# EAGLE board sensor (EAGLE 9.4.2)
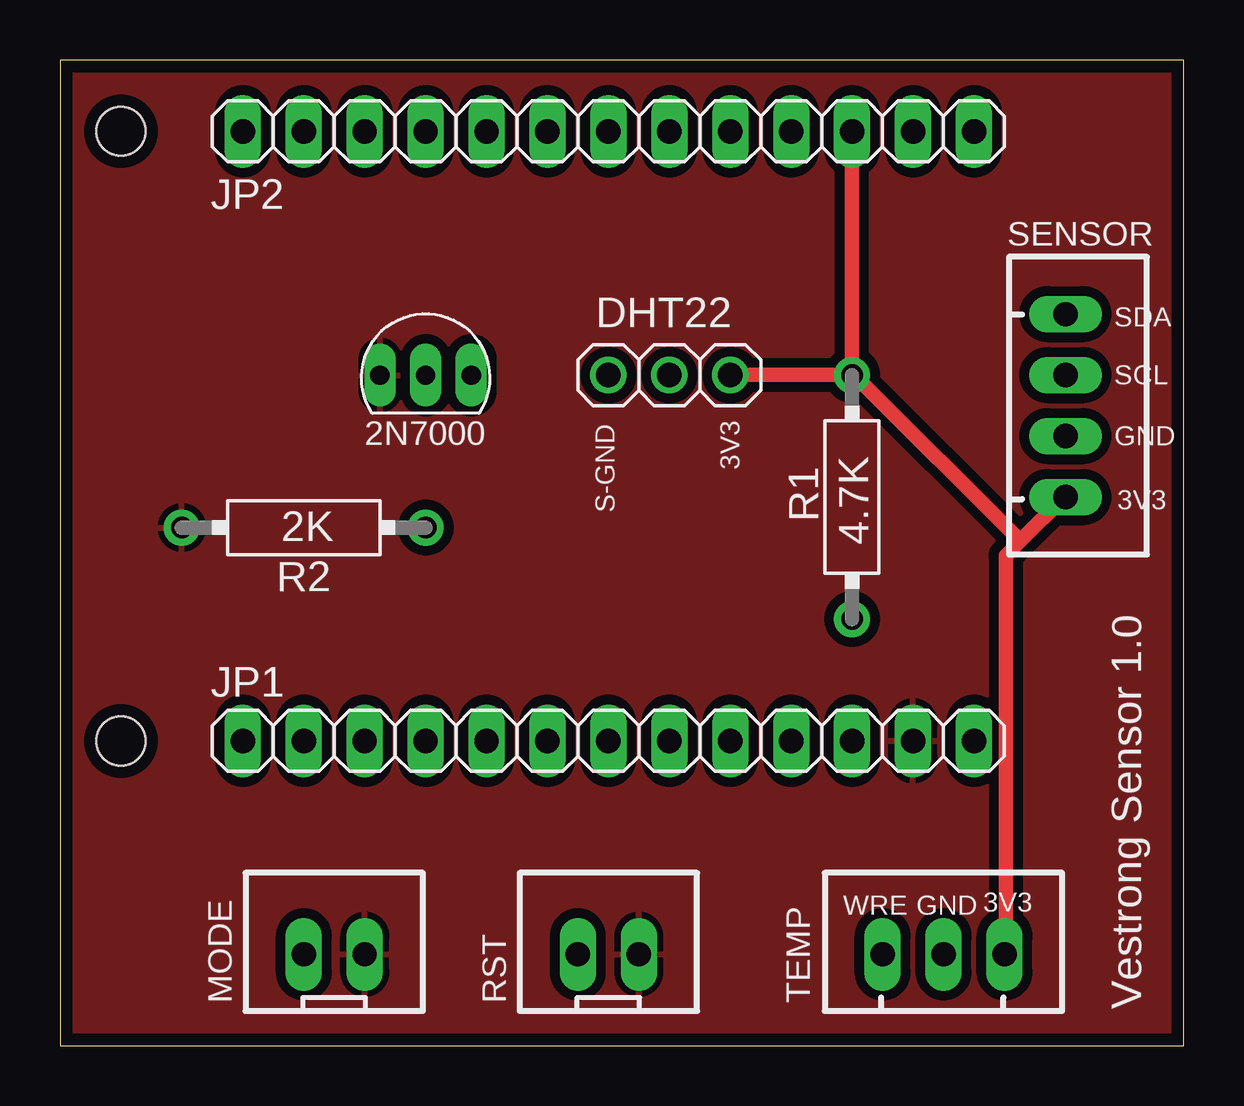
[diagram p0: board, top side]
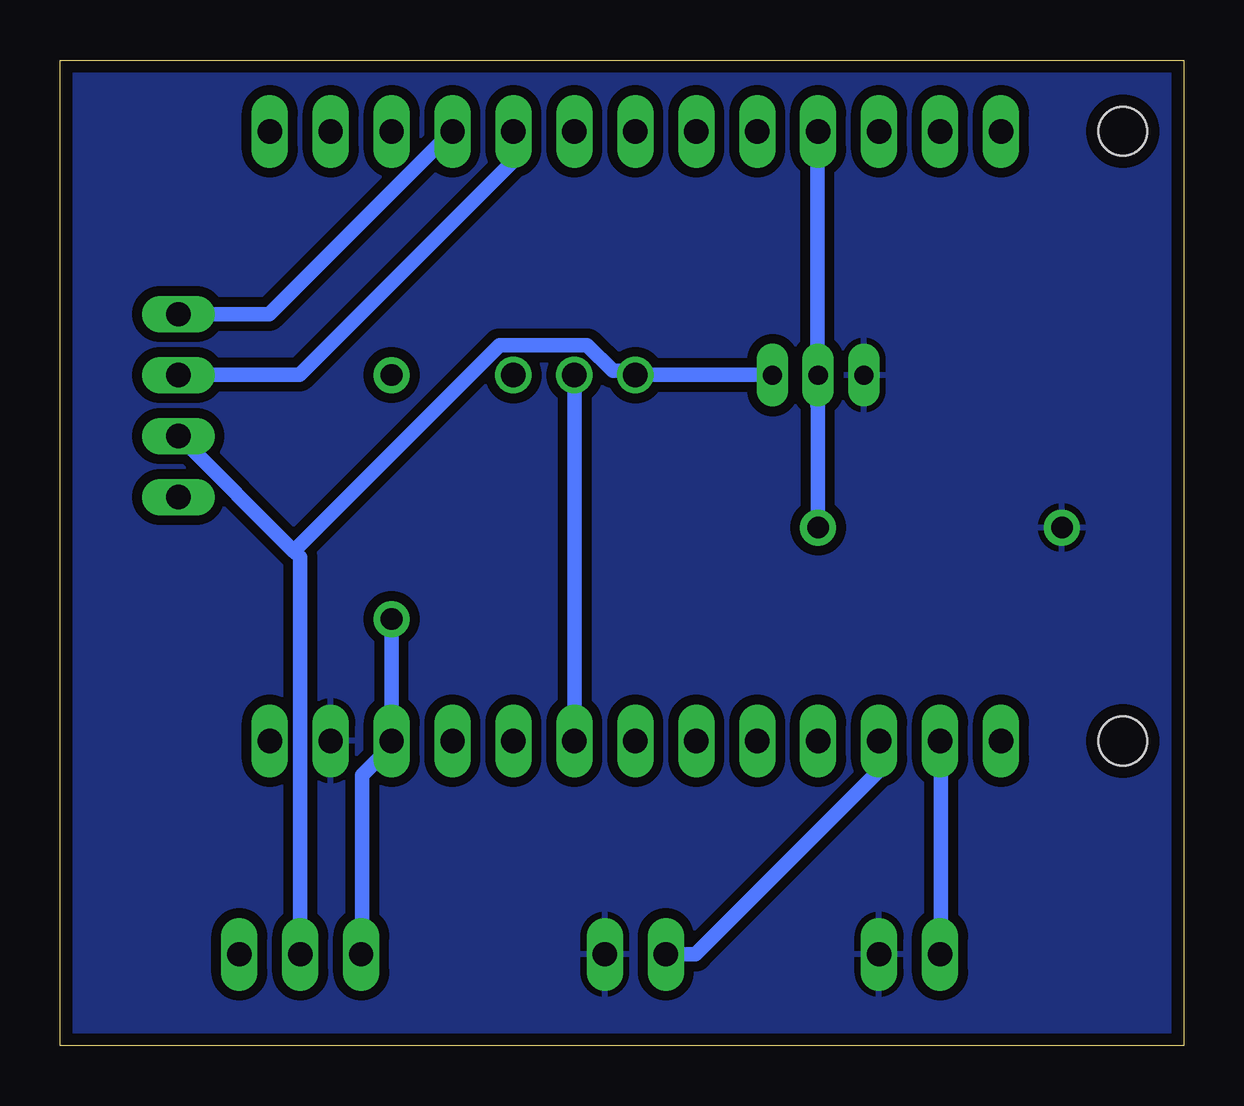
[diagram p1: board, bottom side, seen from below]

Size 46.84 x 41.07 mm. Coordinates in mm from the lower left corner, seen from the top.
Outline: 0,0 46.84,0 46.84,41.07 0,41.07 0,0
Copper layers (1*16): Top 0.035mm / dielectric 1.5mm / Bottom 0.035mm
Design rules "ShenZhen2U_2layer_EagleRules": minimum track width 7mil, minimum drill 12mil, track to track 7mil, track to pad 7mil, pad to pad 7mil, via to via 7mil, smd to smd 0mil, copper to edge 20mil, drill to drill 10mil, minimum pad ring 10mil, minimum via ring 6mil, stop-mask expansion 2mil, vias tented up to drill 25mil, thermal gap 10mil
Net classes: 1 pwr: width 0.6 mm
Holes 2.03 mm at 2.54,12.7 2.54,38.1

## Footprints (pad centres in the part's own frame; a part is rotated, then mirrored left to right if it is on the bottom)
1X03 = drill 1.016: 1 -2.54,0; 2 0,0; 3 2.54,0
1X13 = drill 1.016 long: 1 -15.24,0; 2 -12.7,0; 3 -10.16,0; 4 -7.62,0; 5 -5.08,0; 6 -2.54,0; 7 0,0; 8 2.54,0; 9 5.08,0; 10 7.62,0; 11 10.16,0; 12 12.7,0; 13 15.24,0
JST-XH-02-PACKAGE-LONG-PAD = drill 1.016 long: 1 -1.27,0; 2 1.27,0
TO92 = drill 0.8 pad 1.27 long: B 0,0; C 0,-1.905; E 0,1.905
HPS58 = drill 0.9 pad 1.5: 1 -5.08,0; 2 5.08,0
JST-XH-04-PACKAGE-LONG-PAD = drill 1.016 long: 1 -3.81,0; 2 -1.27,0; 3 1.27,0; 4 3.81,0
JST-XH-03-PACKAGE-LONG-PAD = drill 1.016 long: 1 -2.54,0; 2 0,0; 3 2.54,0

## Placement (x,y rotation side)
DHT22  DHT22  [1X03]  25.4,27.94 180 top
JP1  JP1  [1X13]  22.86,12.7 0 top
JP2  JP2  [1X13]  22.86,38.1 0 top
MODE  JST-XH-02-PIN-LONG-PAD  [JST-XH-02-PACKAGE-LONG-PAD]  11.43,3.81 0 top
MOSFET1  2N7000  [TO92]  15.24,27.94 270 top
R1  4.7K  [HPS58]  33.02,22.86 270 top
R2  2K  [HPS58]  10.16,21.59 0 top
RST  JST-XH-02-PIN-LONG-PAD  [JST-XH-02-PACKAGE-LONG-PAD]  22.86,3.81 0 top
SENSOR  JST-XH-04-PIN-LONG-PAD  [JST-XH-04-PACKAGE-LONG-PAD]  41.91,26.67 270 top
TEMP  JST-XH-03-PIN-LONG-PAD  [JST-XH-03-PACKAGE-LONG-PAD]  36.83,3.81 0 top

## Library data of the parts
DHT22 JP1 JP2 = adafruit
MODE RST SENSOR TEMP = Rembrandt Electronics - JST XH Connectors v1-0
MOSFET1 = 2N7000; AVAILABILITY: Unavailable; DESCRIPTION: MOSFETs- Power and Small Signal 60V 200mA N-Channel No-Cancel/No-Return; MF: STMicroelectronics; MP: 2N7000; PACKAGE: TO-92 ON Semiconductor; PRICE: None
R1 R2 = resistor-power; OC_FARNELL: unknown; OC_NEWARK: unknown

## Nets
1WIRE [pwr]: JP1.11 R1.2 TEMP.1
3.3V [pwr]: DHT22.1 JP2.11 R1.1 SENSOR.4 TEMP.3
DATA_T [pwr]: DHT22.2 JP1.8
GND [pwr]: JP1.12 MODE.2 MOSFET1.C R2.1 RST.2
MODE [pwr]: JP1.2 MODE.1
RST [pwr]: JP1.3 RST.1
SCL [pwr]: JP2.9 SENSOR.2
SDA [pwr]: JP2.10 SENSOR.1
SENS_ENABLE [pwr]: JP2.4 MOSFET1.B R2.2
SENS_GND [pwr]: DHT22.3 MOSFET1.E SENSOR.3 TEMP.2

## Tracks (layer width: path | path; a pad name or v marks a point on that pad's centre or on a via)
1WIRE
  Bottom 0.6: R1.2 JP1.11 33.1,12.42 34.24,11.28 34.24,3.83 TEMP.1
3.3V
  Top 0.6: R1.1 33.02,27.96 27.99,27.96 DHT22.1 | R1.1 JP2.11 | 40.03,21.03 41.86,22.86 SENSOR.4 | 40.03,21.03 39.42,20.42 39.42,3.83 TEMP.3 | 40.03,21.03 33.25,27.81 R1.1
DATA_T
  Bottom 0.6: DHT22.2 JP1.8
GND
  pour Bottom (isolate 0.406): 0,0 0,41.02 46.99,41.02 46.99,0
  pour Top (isolate 0.406): 0,41.02 46.99,41.02 46.99,0 0,0
MODE
  Bottom 0.6: MODE.1 10.13,3.82 10.13,12.62 JP1.2
RST
  Bottom 0.6: RST.1 20.34,3.81 12.7,11.46 JP1.3
SCL
  Bottom 0.6: JP2.9 27.94,36.88 36.85,27.96 41.86,27.96 SENSOR.2
SDA
  Bottom 0.6: SENSOR.1 38.12,30.48 30.5,38.1 JP2.10
SENS_ENABLE
  Bottom 0.6: R2.2 15.24,26.66 15.27,26.67 15.27,27.89 MOSFET1.B 15.27,28.19 15.27,38.1 JP2.4
SENS_GND
  Bottom 0.6: MOSFET1.E 17.17,27.96 22.81,27.96 DHT22.3 23.11,28.12 23.8,28.12 24.87,29.18 28.52,29.18 37.1,20.61 | TEMP.2 36.83,20.34 37.1,20.61 | 37.1,20.61 41.86,25.38 SENSOR.3

## Text on the board
tPlace: SDA | SCL | GND | 3V3 | S-GND | 3V3 | 3V3 | WRE | GND | Vestrong Sensor 1.0